# Altium PCB LEDThermometer.PcbDoc
Units mm, origin at the board's own origin, x right, y up, seen from the top; angles counter-clockwise.
Board outline 125 x 50 mm, 2 copper layers (Top Layer, Bottom Layer), stack 1.58 mm thick; 85 components, 69 nets, 272 pads, 8 vias.
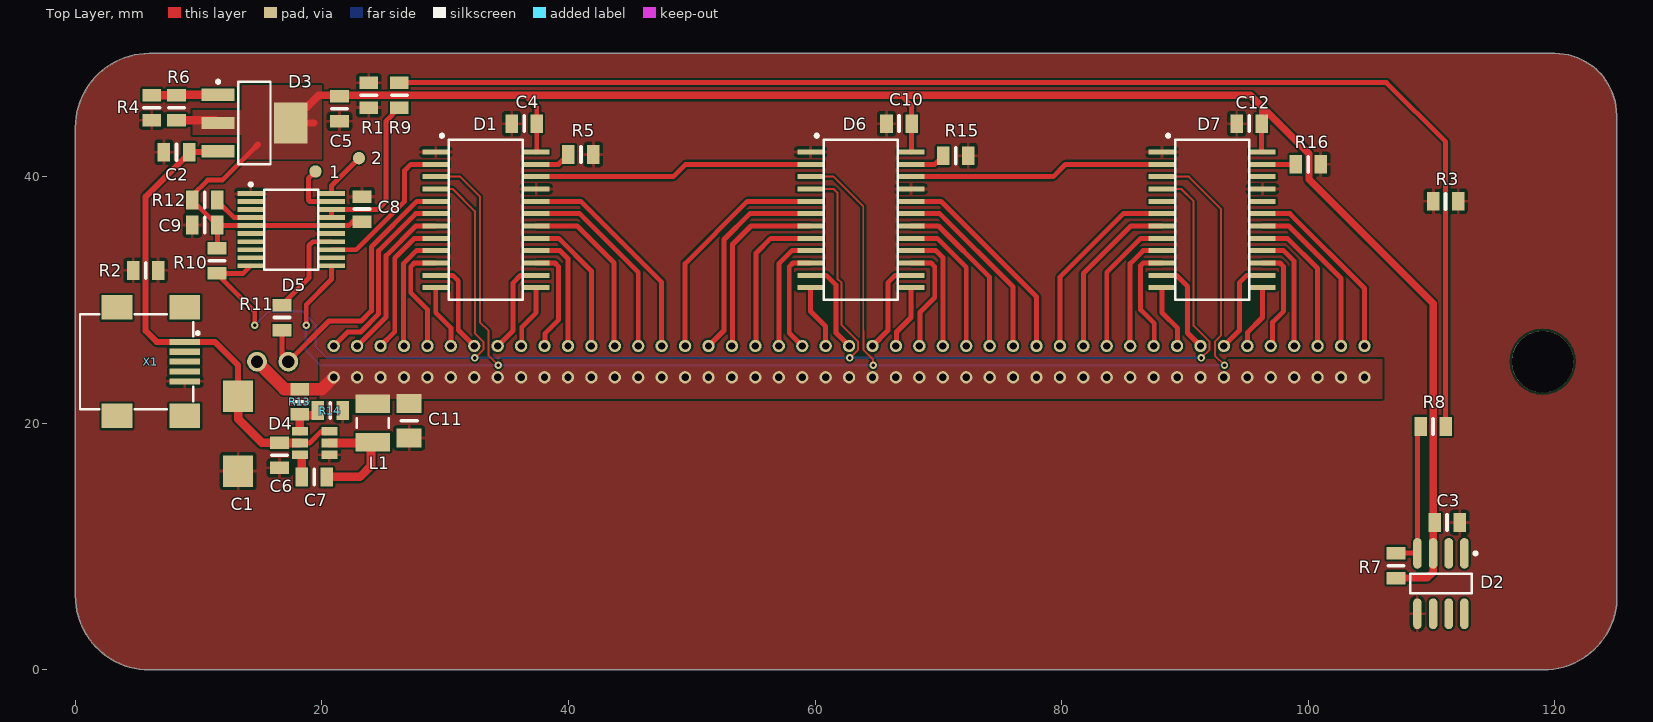
[diagram p0: Top Layer view]
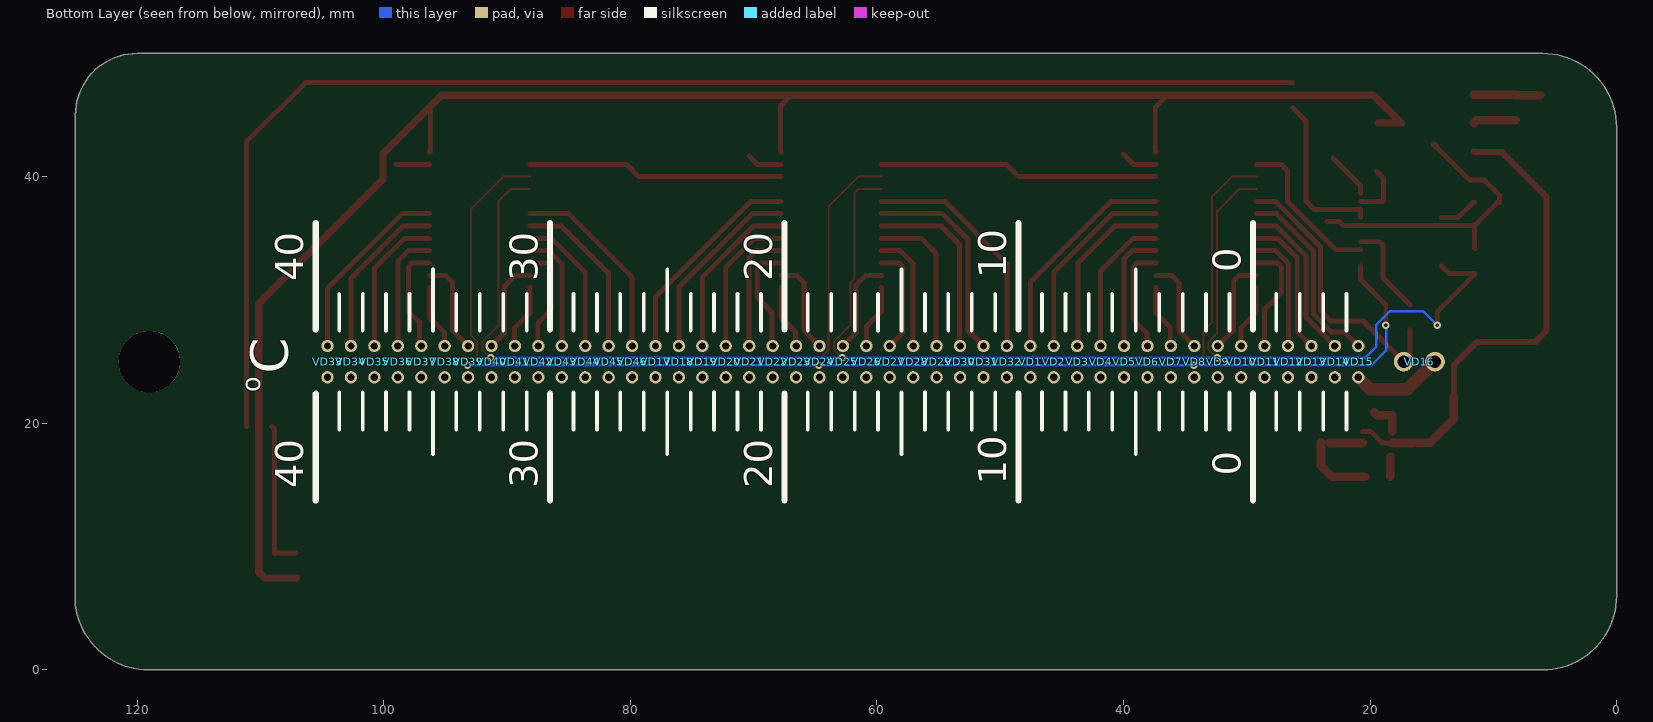
[diagram p1: Bottom Layer view, seen from below]
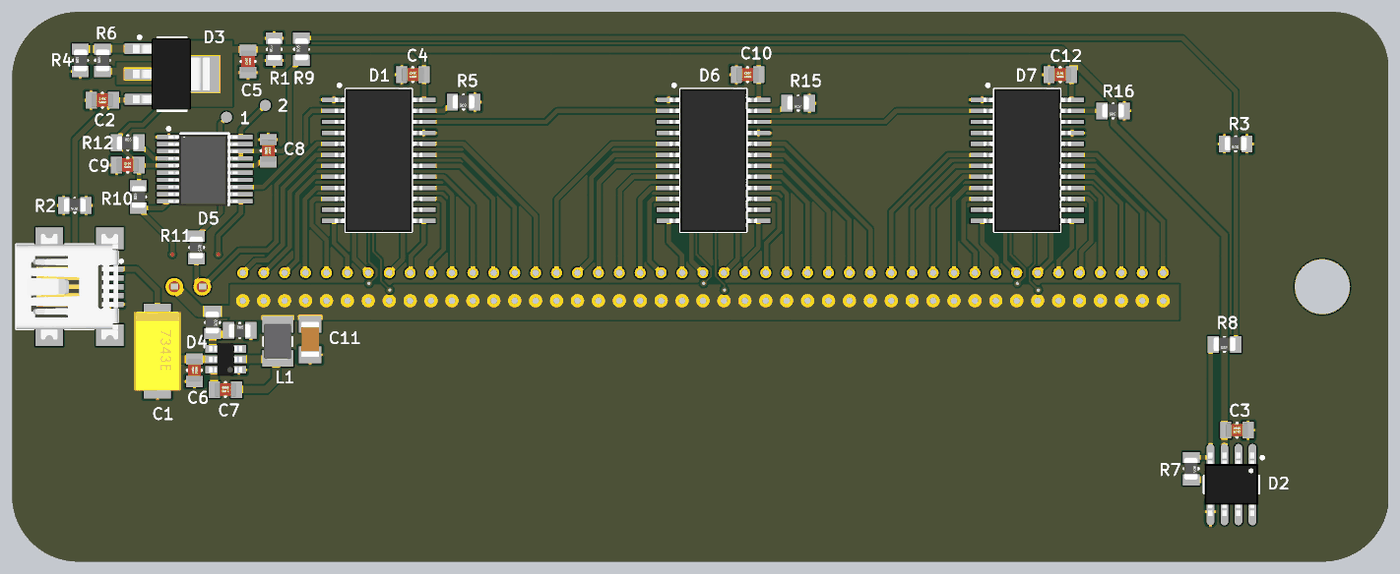
[diagram p2: 3D render of the assembled board from above, using the file's embedded part models]

## Layer stack, top to bottom
Top Solder: solder mask 0.0102, Solder Resist, Dk 3.5
Top Layer: signal copper 0.018
Dielectric 1: dielectric 1.5437, FR-4, Dk 4.8
Bottom Layer: signal copper 0.018
Bottom Solder: solder mask 0.0102, Solder Resist, Dk 3.5

## Board outline
0,44 0,6 ccw(c6,6) 6,0 119.047,0 ccw(c119.047,6) 125,5.251 125,44.989 ccw(c119.989,44.989) 119.989,50 6,50 ccw(c6,44)

## Design rules (kind name [scope] priority, off if disabled: settings)
Clearance [All] p1: gap=0.16 ignorepadtopadclearanceinfootprint=FALSE except(0: Arc-Hole Track-Hole SMDPad-Hole THPad-Hole Via-Hole Fill-Hole Poly-Hole Region-Hole Text-Hole)
ComponentClearance [All] p1: gap=-1 collisioncheckmode=3 verticalgap=0.254 showdistances=FALSE
HoleSize [All] p1: absolutevalues=TRUE maxlimit=5 minlimit=0.3 maxpercent=80.000 minpercent=20.000
PolygonConnect ThermoPowerPolygon [InNet('3,3В') or InNet('1,8В') or InNet('2,2В')] p1: connectstyle=Direct reliefconductorwidth=0.3 reliefentries=4 polygonreliefangle="90 Angle" airgapwidth=0.3
PolygonConnect PolygonConnect_1 [All] p2: connectstyle=Relief reliefconductorwidth=0.254 reliefentries=4 polygonreliefangle="90 Angle" airgapwidth=0.254
RoutingVias [All] p1: holewidth=0.711 width=1.27 viastyle="Through Hole" minholewidth=0.711 minwidth=1.27 maxholewidth=0.711 maxwidth=1.27
SolderMaskExpansion SolderMaskExpansion_LittleObj [InComponent('D4') or InComponent('D5') or InComponent('X1')] p1: expansion=0.15
SolderMaskExpansion [All] p2: expansion=0.102
Width WidthPower [InNet('5В') or InNet('3,3В') or InNet('1,8В') or InNet('NetC7_1') or InNet('GND')] p1: maxlimit=1.5 minlimit=0.4 preferedwidth=1.5 minimp=50.000000 maximp=50.000000 favimp=50.000000 checkconnectedcopper=TRUE
Width WidthAll [All] p2: maxlimit=1.5 minlimit=0.16 preferedwidth=0.4 minimp=50.000000 maximp=50.000000 favimp=50.000000 checkconnectedcopper=TRUE
28 further rules are at their usual default settings.

## Components (designator, comment, footprint, x,y, rotation, side; value= is the part's Value field where it differs from the comment)
1 "*" point 19.475,40.425 r90 top
2 "*" point 23,41.5 r90 top
C1 "D-20 В-47 мкФ±10 %" "CAP POL 2917/7343" 13.2,19.15 r270 top value="47 мкФ"
C2 "0805-16 В-X7R-1мкФ±10 %" SMD-0805C 8.2,41.975 r90 top value="1 мкФ"
C3 "0805-16 В-X7R-0,1мкФ±10 %" SMD-0805C 111.25,11.95 r270 top value="0,1 мкФ"
C4 "0805-16 В-X7R-0,1мкФ±10 %" SMD-0805C 36.4,44.3 r90 top value="0,1 мкФ"
C5 "0805-16 В-X7R-1мкФ±10 %" SMD-0805C 21.425,45.5 r180 top value="1 мкФ"
C6 "0805-16 В-X7R-0,1мкФ±10 %" SMD-0805C 16.55,17.4 r180 top value="0,1 мкФ"
C7 "0805-16 В-X7R-0,1мкФ±10 %" SMD-0805C 19.375,15.65 r270 top value="0,1 мкФ"
C8 "0805-16 В-X7R-0,1мкФ±10 %" SMD-0805C 23.25,37.375 r0 top value="0,1 мкФ"
C9 "0805-16 В-X7R-0,1мкФ±10 %" SMD-0805C 10.5,36.075 r90 top value="0,1 мкФ"
C10 "0805-16 В-X7R-0,1мкФ±10 %" SMD-0805C 66.8,44.3 r90 top value="0,1 мкФ"
C11 "1206-16 В-X7R-22мкФ±10 %" SMD-1206C 27.075,20.203 r180 top value="22 мкФ"
C12 "0805-16 В-X7R-0,1мкФ±10 %" SMD-0805C 95.2,44.3 r90 top value="0,1 мкФ"
D1 "MBI5039GF-B" SOP24L 33.3,36.5 r270 top locked
D2 "DS18B20Z+" SO8_M 110.75,7 r270 top
D3 "LM317DCYR" SOT223_M 14.525,44.35 r0 top
D4 "TPS562200DDCT" SOT23-6_M 19.4,18.4 r180 top
D5 "STM32F030F4P6" TSSOP-20 17.5,35.7 r270 top
D6 "MBI5039GF-B" SOP24L 63.7,36.5 r270 top locked
D7 "MBI5039GF-B" SOP24L 92.2,36.5 r270 top locked
L1 "NLCV32T-2R2M-EF" 1210_M 24.125,20.025 r90 top value="2,2 мкГн"
R1 "0805±5 %-0 Ом" SMD-0805-RES 23.8,46.6 r0 top value="0 Ом"
R2 "0805±5 %-0 Ом" SMD-0805-RES 5.7,32.4 r90 top value="0 Ом"
R3 "0805±5 %-0 Ом" SMD-0805-RES 111.131,38 r90 top value="0 Ом"
R4 "0805±1 %-2 кОм" SMD-0805-RES 6.2,45.6 r0 top value="2 кОм"
R5 "0805±1 %-10 кОм" SMD-0805-RES 41,41.8 r90 top value="10 кОм"
R6 "0805±1 %-1,3 кОм" SMD-0805-RES 8.2,45.6 r0 top value="1,3 кОм"
R7 "0805±5 %-4,7 кОм" SMD-0805-RES 107.1,8.45 r180 top value="4,7 кОм"
R8 "0805±5 %-0 Ом" SMD-0805-RES 110.115,19.75 r90 top value="0 Ом"
R9 "0805±5 %-0 Ом" SMD-0805-RES 26.275,46.609 r0 top value="0 Ом"
R10 "0805±5 %-10 кОм" SMD-0805-RES 11.475,33.175 r0 top value="10 кОм"
R11 "не устанавливать" SMD-0805-RES 16.75,28.575 r180 top value=DNP
R12 "0805±5 %-10 кОм" SMD-0805-RES 10.5,38.1 r270 top value="10 кОм"
R13 "0805±1 %-19,6 кОм" SMD-0805-RES 18.2,21.75 r180 top value="19,6 кОм"
R14 "0805±1 %-10,2 кОм" SMD-0805-RES 20.675,21.025 r270 top value="10,2 кОм"
R15 "0805±1 %-10 кОм" SMD-0805-RES 71.4,41.7 r90 top value="10 кОм"
R16 "0805±1 %-10 кОм" SMD-0805-RES 100,41 r90 top value="10 кОм"
VD1 "L-144IDT" LED_1.9x3.9mm 47.55,25 r90 bottom locked
VD2 "L-144IDT" LED_1.9x3.9mm 45.65,25 r90 bottom locked
VD3 "L-144IDT" LED_1.9x3.9mm 43.75,25 r90 bottom locked
VD4 "L-144IDT" LED_1.9x3.9mm 41.85,25 r90 bottom locked
VD5 "L-144IDT" LED_1.9x3.9mm 39.95,25 r90 bottom locked
VD6 "L-144IDT" LED_1.9x3.9mm 38.05,25 r90 bottom locked
VD7 "L-144IDT" LED_1.9x3.9mm 36.15,25 r90 bottom locked
VD8 "L-144IDT" LED_1.9x3.9mm 34.25,25 r90 bottom locked
VD9 "L-144IDT" LED_1.9x3.9mm 32.35,25 r90 bottom locked
VD10 "L-144IDT" LED_1.9x3.9mm 30.45,25 r90 bottom locked
VD11 "L-144IDT" LED_1.9x3.9mm 28.55,25 r90 bottom locked
VD12 "L-144IDT" LED_1.9x3.9mm 26.65,25 r90 bottom locked
VD13 "L-144IDT" LED_1.9x3.9mm 24.75,25 r90 bottom locked
VD14 "L-144IDT" LED_1.9x3.9mm 22.85,25 r90 bottom locked
VD15 "L-144IDT" LED_1.9x3.9mm 20.95,25 r90 bottom locked
VD16 "L-793ID" LED_8mm 16,25 r0 bottom locked
VD17 "L-144IDT" LED_1.9x3.9mm 77.95,25 r90 bottom locked
VD18 "L-144IDT" LED_1.9x3.9mm 76.05,25 r90 bottom locked
VD19 "L-144IDT" LED_1.9x3.9mm 74.15,25 r90 bottom locked
VD20 "L-144IDT" LED_1.9x3.9mm 72.25,25 r90 bottom locked
VD21 "L-144IDT" LED_1.9x3.9mm 70.35,25 r90 bottom locked
VD22 "L-144IDT" LED_1.9x3.9mm 68.45,25 r90 bottom locked
VD23 "L-144IDT" LED_1.9x3.9mm 66.55,25 r90 bottom locked
VD24 "L-144IDT" LED_1.9x3.9mm 64.65,25 r90 bottom locked
VD25 "L-144IDT" LED_1.9x3.9mm 62.75,25 r90 bottom locked
VD26 "L-144IDT" LED_1.9x3.9mm 60.85,25 r90 bottom locked
VD27 "L-144IDT" LED_1.9x3.9mm 58.95,25 r90 bottom locked
VD28 "L-144IDT" LED_1.9x3.9mm 57.05,25 r90 bottom locked
VD29 "L-144IDT" LED_1.9x3.9mm 55.15,25 r90 bottom locked
VD30 "L-144IDT" LED_1.9x3.9mm 53.25,25 r90 bottom locked
VD31 "L-144IDT" LED_1.9x3.9mm 51.35,25 r90 bottom locked
VD32 "L-144IDT" LED_1.9x3.9mm 49.45,25 r90 bottom locked
VD33 "L-144IDT" LED_1.9x3.9mm 104.55,25 r90 bottom locked
VD34 "L-144IDT" LED_1.9x3.9mm 102.65,25 r90 bottom locked
VD35 "L-144IDT" LED_1.9x3.9mm 100.75,25 r90 bottom locked
VD36 "L-144IDT" LED_1.9x3.9mm 98.85,25 r90 bottom locked
VD37 "L-144IDT" LED_1.9x3.9mm 96.95,25 r90 bottom locked
VD38 "L-144IDT" LED_1.9x3.9mm 95.05,25 r90 bottom locked
VD39 "L-144IDT" LED_1.9x3.9mm 93.15,25 r90 bottom locked
VD40 "L-144IDT" LED_1.9x3.9mm 91.25,25 r90 bottom locked
VD41 "L-144IDT" LED_1.9x3.9mm 89.35,25 r90 bottom locked
VD42 "L-144IDT" LED_1.9x3.9mm 87.45,25 r90 bottom locked
VD43 "L-144IDT" LED_1.9x3.9mm 85.55,25 r90 bottom locked
VD44 "L-144IDT" LED_1.9x3.9mm 83.65,25 r90 bottom locked
VD45 "L-144IDT" LED_1.9x3.9mm 81.75,25 r90 bottom locked
VD46 "L-144IDT" LED_1.9x3.9mm 79.85,25 r90 bottom locked
X1 "DS1104-B60SRS" Mini-USB-B 5,25 r270 top locked

## Footprints (in the part's own frame and the unit in brackets; to place one, negate y for a bottom-side part, rotate by r counter-clockwise, add the part's x,y. Pads: shape width x height; smd on the part's side, far side on the other; paste and mask are expansions set on the pad)
1210_M [mm] "Body 3.2x2.5mm, IPC Low Density"
  rect 1.5x2.8 smd: 1(-1.55,0) 2(1.55,0)
  silkscreen extent -0.4,-1.3 0.4,1.3, body extent -1.6,-1.25 1.6,1.25, height 1.9
"CAP POL 2917/7343" [mm] "Molded Capacitor, 2-Leads, Body 7.30x4.30mm, IPC Medium Density"
  rect 2.55x2.45 smd: 1(-3.025,0) 2(3.025,0)
  body extent -3.65,-2.15 3.65,2.15, height 4.1
LED_1.9x3.9mm [mm] "Photosensitive Diode; 2 Leads"
  round 1 hole 0.6: 1(-1.27,0) 2(1.27,0)
  body extent -1.95,-0.95 1.95,0.95, height 7
LED_8mm [mm] "Photosensitive Diode; 2 Leads"
  round 1.6 hole 1: 1(-1.27,0) 2(1.27,0)
  body extent -4.48,-4.52 4.05,4.47, height 11
Mini-USB-B [mm] "Mini USB 2.0 Type B SMT Horizontal 5 Contacts"
  rect 0.5x2.5 smd: 1(-1.6,3.875) 2(-0.8,3.875) 3(0,3.875) 4(0.8,3.875) 5(1.6,3.875)
  rect 2x2.5 smd: Shell(-4.4,3.875) Shell(-4.4,-1.625) Shell(4.4,3.875) Shell(4.4,-1.625)
  silkscreen extent -3.85,-4.62 3.85,5.04, body extent -4.8,-4.62 4.8,4.63, height 3.92
point [mm] "Point; 1 Position"
  round 1 smd: 1(0,0)
SMD-0805-RES [mil]
  rect 60x40 smd: 1(0,40) 2(0,-40)
  silkscreen extent -25,0 25,0, body extent -24,-39 26,39, height 31
SMD-0805C [mil]
  rect 60x40 smd: 1(0,40) 2(0,-40)
  silkscreen extent -25,0 25,0, body extent -25,-39 25,39, height 35
SMD-1206C [mil]
  rect 80x60 smd: 1(0,55) 2(0,-55)
  silkscreen extent -25,0 25,0, body extent -31,-63 32,63, height 39
SO8_M [mm] "SOIC, 8-Leads, Body 4.9x3.9mm, Pitch 1.27mm, IPC Low Density"
  oval 2.5x0.7 smd: 1(-2.45,1.905) 2(-2.45,0.635) 3(-2.45,-0.635) 4(-2.45,-1.905) 5(2.45,-1.905) 6(2.45,-0.635) 7(2.45,0.635) 8(2.45,1.905)
  silkscreen extent -2.57,-2.5 0.8,2.93, body extent -2.91,-2.45 2.86,2.45, height 1.45
SOP24L [mm] "SOP, Plastic; 24 Leads; Body Width 6 mm; Pitch 1 mm"
  rect 0.4x2.15 smd: 1(-5.5,-4.075) 2(-4.5,-4.075) 3(-3.5,-4.075) 4(-2.5,-4.075) 5(-1.5,-4.075) 6(-0.5,-4.075) 7(0.5,-4.075) 8(1.5,-4.075) 9(2.5,-4.075) 10(3.5,-4.075) 11(4.5,-4.075) 12(5.5,-4.075) 13(5.5,4.075) 14(4.5,4.075) 15(3.5,4.075) 16(2.5,4.075) 17(1.5,4.075) 18(0.5,4.075) 19(-0.5,4.075) 20(-1.5,4.075) 21(-2.5,4.075) 22(-3.5,4.075) 23(-4.5,4.075) 24(-5.5,4.075)
  silkscreen extent -6.95,-3.7 6.5,3, body extent -6.5,-3.98 6.5,3.98, height 1.65
SOT23-6_M [mm] "SOT23, 6-Leads, Body 2.9x1.6mm, Pitch 0.95mm, Lead Span 2.7mm, IPC Low Density"
  rect 1.3x0.7 smd: 1(-1.2,0.95) 2(-1.2,0) 3(-1.2,-0.95) 4(1.2,-0.95) 5(1.2,0) 6(1.2,0.95)
  body extent -1.5,-1.5 1.5,1.5, height 1.3
SOT223_M [mm] "SOT223, 4-Leads, Body 6.5x3.5mm, Pitch 2.3mm, Lead Span 7mm, IPC Low Density"
  rect 2.7x1 smd: 1(-2.95,2.3) 2(-2.95,0) 3(-2.95,-2.3)
  rect 2.7x3.3 smd: 2(2.95,0)
  silkscreen extent -3.07,-3.35 1.3,3.47, body extent -3.55,-3.25 3.41,3.25, height 1.65
TSSOP-20 [mm] "TSSOP, Plastic; 20 Leads; Body Width 5.3 mm; Pitch 0.65 mm"
  rect 0.4x2.15 smd: 1(-2.925,-3.275) 2(-2.275,-3.275) 3(-1.625,-3.275) 4(-0.975,-3.275) 5(-0.325,-3.275) 6(0.325,-3.275) 7(0.975,-3.275) 8(1.625,-3.275) 9(2.275,-3.275) 10(2.925,-3.275) 11(2.925,3.275) 12(2.275,3.275) 13(1.625,3.275) 14(0.975,3.275) 15(0.325,3.275) 16(-0.325,3.275) 17(-0.975,3.275) 18(-1.625,3.275) 19(-2.275,3.275) 20(-2.925,3.275)
  silkscreen extent -3.8,-3.4 3.25,2.2, body extent -3.15,-3.29 3.35,2.99, height 1.1

## Part data
1 2: library part Point
C1: library part Cap_el, "Electrolytic capacitor", ComponentLink1Description=Datasheet
C2 C3 C4 C5 C6 C7 C8 C9 C10 C11 C12: library part Cap, "Capacitor", ComponentLink1Description=Datasheet
D1 D6 D7: library part MBI5039, "16-Channel Constant Current LED Sink Driver with Silent Error Detection and Current Gain", Manufacturer=Macroblock, ComponentLink1Description=Datasheet, ComponentLink1URL=http://www.sddz-ic.com/en/upload/2009321152554277566SA6V.pdf
D2: library part DS18B20, "Programmable Resolution 1-Wire Digital Thermometer", Manufacturer="Maxim Integrated", ComponentLink1Description=Datasheet, ComponentLink1URL=https://datasheets.maximintegrated.com/en/ds/DS18B20.pdf
D3: library part LM317, "3-Terminal Adjustable Regulator", Manufacturer="Texas Instruments", ComponentLink1Description=Datasheet, ComponentLink1URL=http://www.ti.com/lit/ds/symlink/lm317.pdf
D4: library part TPS562200, "4.5-V To 17-V Input, 2-A, 3-A Synchronous Step-Down Voltage Regulator", Manufacturer="Texas Instruments", ComponentLink1Description=Datasheet, ComponentLink1URL=http://www.ti.com/lit/ds/symlink/tps562200.pdf
D5: library part STM32F030F, "Value-line ARM®-based 32-bit MCU with up to 256-KB Flash,   timers, ADC, communication interfaces, 2.4-3.6 V operation", Manufacturer=STMicroelectronics, ComponentLink1Description=Datasheet, ComponentLink1URL=http://www.st.com/content/ccc/resource/technical/document/datasheet/a4/5d/0b/0e/87/c4/4d/71/DM00088500.pdf/files/DM00088500.pdf/jcr:content/translations/en.DM00088500.pdf
L1: library part Inductor, "Inductor", Manufacturer=TDK, ComponentLink1Description=Datasheet, ComponentLink1URL=https://product.tdk.com/info/en/catalog/datasheets/inductor_commercial_decoupling_nlcv32-ef_en.pdf
R1 R2 R3 R4 R5 R6 R7 R8 R9 R10 R11 R12 R13 R14 R15 R16: library part Res, "Resistor", ComponentLink1Description=Datasheet
VD1 VD2 VD3 VD4 VD5 VD6 VD7 VD8 VD9 VD10 VD11 VD12 VD13 VD14 VD15 VD16 VD17 VD18 VD19 VD20 VD21 VD22 VD23 VD24 VD25 VD26 VD27 VD28 VD29 VD30 VD31 VD32 VD33 VD34 VD35 VD36 VD37 VD38 VD39 VD40 VD41 VD42 VD43 VD44 VD45 VD46: library part LED, "Typical INFRARED GaAs LED", Manufacturer=Kingbright, ComponentLink1Description=Datasheet
  VD1 VD2 VD3 VD4 VD5 VD6 VD7 VD8 VD9 VD10 VD11 VD12 VD13 VD14 VD15 VD17 VD18 VD19 VD20 VD21 VD22 VD23 VD24 VD25 VD26 VD27 VD28 VD29 VD30 VD31 VD32 VD33 VD34 VD35 VD36 VD37 VD38 VD39 VD40 VD41 VD42 VD43 VD44 VD45 VD46: ComponentLink1URL=http://www.kingbright.com/attachments/file/psearch/000/00/00/L-144IDT(Ver.13A).pdf
  VD16: ComponentLink1URL=http://www.kingbright.com/attachments/file/psearch/000/00/00/L-793ID(Ver.10A).pdf
X1: library part MINI-USB-B, "Mini USB-B connector", Manufacturer="Connfly Electronics", ComponentLink1Description=Datasheet, ComponentLink1URL=https://lib.chipdip.ru/497/DOC001497231.pdf

## Free pads (board coordinates)
  round 5 hole 5: 2(119,25)

## Via types
v1: diameter 0.6, hole 0.3, Top Layer to Bottom Layer, tented both sides, 8 vias

## Nets (pads, with @x,y where several pads share a name; then routed paths per layer and width w, separated by ;. In a path a pad name is that pad's centre, name@x,y a point inside that pad or via, vN(x,y) a via of type N, cw(c..) or ccw(c..) an arc to the next point about the centre after c; other vN are vias at no path point)
0t: D1.10 VD11.2 | length 9.1
  Top Layer w0.4: VD11.2 28.55,29.25 27.2,30.6 27.2,32.7 27.5,33 D1.10
1t: D1.12 VD10.2 | length 5.2
  Top Layer w0.4: D1.12 29.225,28.975 30.45,27.75 VD10.2
2,2В: C11.2 L1.2 R13.2 VD1.1 VD2.1 VD3.1 VD4.1 VD5.1 VD6.1 VD7.1 VD8.1 VD9.1 VD10.1 VD11.1 VD12.1 VD13.1 VD14.1 VD15.1 VD16.1 VD17.1 VD18.1 VD19.1 VD20.1 VD21.1 VD22.1 VD23.1 VD24.1 VD25.1 VD26.1 VD27.1 VD28.1 VD29.1 VD30.1 VD31.1 VD32.1 VD33.1 VD34.1 VD35.1 VD36.1 VD37.1 VD38.1 VD39.1 VD40.1 VD41.1 VD42.1 VD43.1 VD44.1 VD45.1 VD46.1 | length 7.5
  Top Layer w1: VD16.1 16.955,22.775 ; 19.995,22.775 VD15.1
  Top Layer w1.016: 16.955,22.775 19.995,22.775
2t: D1.11 VD9.2 | length 7.8
  Top Layer w0.4: D1.11 30.6,32 31.05,31.55 31.05,27.57 VD9.2
3,3В: C3.2 C4.2 C5.2 C8.2 C9.2 C10.2 C12.2 D1.24 D2.3 D3.2 D5.5 D5.16 D6.24 D7.24 R6.2 R7.1 R10.1 R12.2 | length 170.3
  Top Layer w0.4: R10.1 11.516,34.232 C9.2 ; 14.6,42.4 11.925,39.725 10.725,39.725 9.484,38.484 9.484,37.9 9.691,37.9 C9.2 ; C8.2@23.509,36.359 C8.2 22.484,36.359 22.15,36.025 D5.16 D5.5 11.566,36.025 C9.2 ; 36.45,46.6 37.416,45.634 C4.2 37.416,42.041 D1.24 ; 66.95,46.6 67.816,45.734 C10.2 67.816,42.041 D6.24 ; 96.2,45.625 96.2,44.316 C12.2 96.216,42.059 D7.24
  Top Layer w0.5: D3.2@11.575,44.35 D3.2@11.625,44.3 ; 14.6,42.4 14.8,42.6
  Top Layer w0.6: 19.35,44.35 17.475,44.35 19.725,46.6 36.45,46.6 66.95,46.6 95.305,46.6 100.048,41.857 100.048,39.778 110.115,29.711 D2.3 110.115,7.915 109.65,7.45 107.116,7.45 R7.1
  Top Layer w0.7: R6.2 11.341,44.584 D3.2@11.575,44.35
3t: D1.14 VD8.2 | length 7.8
  Top Layer w0.4: VD8.2 35.5,27.52 35.5,31.4 36.1,32 D1.14
4t: D1.13 VD7.2 | length 5.3
  Top Layer w0.4: D1.13 37.375,28.975 36.2,27.8 VD7.2@36.2,26.32 ; VD7.2@36.2,26.32 VD7.2 VD7.2@36.2,26.32
5t: D1.15 VD6.2 | length 8.9
  Top Layer w0.4: D1.15 38.9,33 39.2,32.7 39.2,28.4 38.1,27.3 38.1,26.32 VD6.2
5В: C1.1 C2.2 C6.2 D3.3 D4.3 D4.5 X1.1 | length 39.9
  Top Layer w0.4: D4.5 19,18.4 19.95,19.35 D4.3
  Top Layer w0.5: D3.3 11.525,42 9.316,42 5.7,38.384 5.7,27.5 6.6,26.6 X1.1 11.3,26.6 13.2,24.7 C1.1
  Top Layer w0.7: C1.1 13.2,20.35 15.134,18.416 16.475,18.416 16.491,18.4 D4.5
6t: D1.16 VD5.2 | length 9.9
  Top Layer w0.4: D1.16 39.3,34 39.95,33.35 VD5.2
7t: D1.17 VD4.2 | length 11.7
  Top Layer w0.4: D1.17 39.2,35 41.85,32.35 VD4.2
8t: D1.18 VD3.2 | length 14.3
  Top Layer w0.4: D1.18 40.7,36 43.7,33 43.7,26.32 VD3.2
9t: D1.19 VD2.2 | length 16.2
  Top Layer w0.4: D1.19 40.9,37 45.65,32.25 VD2.2
10t: D1.20 VD1.2 | length 18.1
  Top Layer w0.4: D1.20 41,38 47.55,31.45 VD1.2
11t: D6.5 VD32.2 | length 18.9
  Top Layer w0.4: VD32.2 49.45,32.95 54.5,38 D6.5
12t: D6.6 VD31.2 | length 17
  Top Layer w0.4: VD31.2 52.6,27.52 52.6,34.9 54.7,37 D6.6
13t: D6.7 VD30.2 | length 15.2
  Top Layer w0.4: VD30.2 53.3,26.32 53.3,34.5 54.8,36 D6.7
14t: D6.8 VD29.2 | length 12.5
  Top Layer w0.4: VD29.2 55.2,26.32 55.2,33.8 56.4,35 D6.8
15t: D6.9 VD28.2 | length 9.7
  Top Layer w0.4: VD28.2 57.05,32.95 58.1,34 D6.9
16t: D6.10 VD27.2 | length 8.7
  Top Layer w0.4: VD27.2 57.9,27.32 57.9,32.7 58.2,33 D6.10
17t: D6.12 VD26.2 | length 5.2
  Top Layer w0.4: D6.12 59.625,29.075 60.85,27.85 VD26.2
18t: D6.11 VD25.2 | length 7.8
  Top Layer w0.4: D6.11 60.9,32 61.7,31.2 61.7,27.32 VD25.2
19t: D6.14 VD24.2 | length 7.8
  Top Layer w0.4: VD24.2 65.9,27.52 65.9,31.4 66.5,32 D6.14
20t: D6.13 VD23.2 | length 5.2
  Top Layer w0.4: VD23.2 66.6,26.32 66.6,27.4 67.775,28.575 D6.13
21t: D6.15 VD22.2 | length 9
  Top Layer w0.4: D6.15 69.4,33 69.7,32.7 69.7,30.2 68.5,29 68.5,26.32 VD22.2
22t: D6.16 VD21.2 | length 10
  Top Layer w0.4: D6.16 69.8,34 70.35,33.45 VD21.2
23t: D6.17 VD20.2 | length 11.8
  Top Layer w0.4: D6.17 69.9,35 72.25,32.65 VD20.2
24t: D6.18 VD19.2 | length 13.7
  Top Layer w0.4: D6.18 70,36 74.15,31.85 VD19.2
25t: D6.19 VD18.2 | length 15.5
  Top Layer w0.4: D6.19 70.1,37 76.05,31.05 VD18.2
26t: D6.20 VD17.2 | length 17.4
  Top Layer w0.4: D6.20 70.2,38 77.95,30.25 VD17.2
27t: D7.6 VD46.2 | length 16
  Top Layer w0.4: VD46.2 79.85,31.85 85,37 D7.6
28t: D7.7 VD45.2 | length 13.8
  Top Layer w0.4: VD45.2 81.75,32.15 85.6,36 86.9,36 D7.7
29t: D7.8 VD44.2 | length 11.6
  Top Layer w0.4: VD44.2 83.65,32.25 86.4,35 D7.8
30t: D7.9 VD43.2 | length 9.7
  Top Layer w0.4: VD43.2 85.55,32.95 86.6,34 D7.9
31t: D7.10 VD42.2 | length 8.8
  Top Layer w0.4: VD42.2 87.5,26.32 87.5,28.1 86.4,29.2 86.4,32.8 86.6,33 D7.10
32t: D7.12 VD41.2 | length 5.3
  Top Layer w0.4: D7.12 88.125,28.975 89.4,27.7 89.4,26.32 VD41.2
33t: D7.11 VD40.2 | length 7.7
  Top Layer w0.4: D7.11 89.3,32 90.2,31.1 90.2,27.32 VD40.2
34t: D7.14 VD39.2 | length 7.8
  Top Layer w0.4: VD39.2 94.4,27.52 94.4,31.4 95,32 D7.14
35t: D7.13 VD38.2 | length 5.2
  Top Layer w0.4: VD38.2 95.05,27.35 96.275,28.575 D7.13
36t: D7.15 VD37.2 | length 8.7
  Top Layer w0.4: D7.15 97.7,33 98,32.7 98,29.1 97.1,28.2 97.1,26.42 VD37.2
37t: D7.16 VD36.2 | length 9.8
  Top Layer w0.4: D7.16 98,34 98.85,33.15 VD36.2
38t: D7.17 VD35.2 | length 11.8
  Top Layer w0.4: D7.17 98.3,35 100.75,32.55 VD35.2
39t: D7.18 VD34.2 | length 13.6
  Top Layer w0.4: D7.18 98.4,36 102.65,31.75 VD34.2
40t: D7.19 VD33.2 | length 15.5
  Top Layer w0.4: D7.19 98.5,37 104.55,30.95 VD33.2
-1t: D1.9 VD12.2 | length 9.8
  Top Layer w0.4: VD12.2 26.6,26.32 26.6,32.949 27.651,34 D1.9
-2t: D1.8 VD13.2 | length 11.6
  Top Layer w0.4: VD13.2 25.9,27.42 25.9,33.4 27.5,35 D1.8
-3t: D1.7 VD14.2 | length 13.3
  Top Layer w0.4: VD14.2 25.2,28.62 25.2,33.6 27.6,36 D1.7
-4t: D1.6 VD15.2 | length 15.7
  Top Layer w0.4: VD15.2 22.08,27.4 23.131,27.4 24.6,28.869 24.6,34 27.6,37 D1.6
-5t: D1.5 R11.1 VD16.2 | length 23.2
  Top Layer w0.4: R11.1 16.75,25.52 VD16.2 20.57,28.3 23.183,28.3 24,29.117 24,34.3 27.7,38 D1.5
GND: C1.2 C2.1 C3.1 C4.1 C5.1 C6.1 C8.1 C9.1 C10.1 C11.1 C12.1 D1.1 D1.21 D2.5 D4.1 D5.1 D5.15 D6.1 D6.21 D7.1 D7.21 R1.1 R1.2 R2.1 R2.2 R3.1 R3.2 R4.2 R5.2 R14.1 R15.2 R16.2 X1.5
Net1_1: 1.1 D5.19 | length 4.5
  Top Layer w0.4: 1.1 18.9,39.85 18.9,38.1 19.025,37.975 D5.19
Net2_1: 2.1 D5.20 | length 3.8
  Top Layer w0.4: D5.20 20.775,39.275 2.1
NetC7_1: C7.1 D4.2 L1.1 | length 8.6
  Top Layer w0.4: 22.15,18.4 22.2,18.45
  Top Layer w0.7: C7.1 23.075,15.65 23.975,16.55 23.975,18.45 L1.1@23.95,18.475 ; D4.2 22.15,18.4 L1.1@23.25,18.4
NetC7_2: C7.2 D4.6 | length 1.9
  Top Layer w0.4: D4.6 D4.6@18.359,17.291
  Top Layer w0.7: C7.2 D4.6@18.359,17.291
NetD1_23: D1.23 R5.1 | length 2.9
  Top Layer w0.4: D1.23 39.184,41 R5.1
NetD2_4: D2.4 R7.2 R8.1 | length 12.2
  Top Layer w0.4: R7.2 108.829,9.466 D2.4 108.845,19.496 R8.1
NetD3_1: D3.1 R4.1 R6.1 | length 5.4
  Top Layer w0.7: R4.1 R6.1 8.234,46.65 D3.1
NetD4_4: D4.4 R13.1 R14.2 | length 2.9
  Top Layer w0.7: D4.4 18.2,20.659 19.418,20.659 R14.2@19.659,20.9
NetD5_4: D5.4 R12.1 | length 3.2
  Top Layer w0.4: R12.1@11.516,37.9 11.65,37.9 12.875,36.675 D5.4
NetD5_14: D5.14 R11.2 | length 7.7
  Top Layer w0.4: R11.2 18.95,31.791 18.95,34.425 19.25,34.725 D5.14
NetD5_17: D5.17 D5.18 R9.2 | length 13.4
  Top Layer w0.4: D5.17 D5.18 24.5,37.325 25.2,38.025 25.2,44.518 R9.2
NetD6_23: D6.23 R15.1 | length 2.9
  Top Layer w0.4: D6.23 69.684,41 R15.1
NetD7_23: D7.23 R16.1 | length 2.7
  Top Layer w0.4: D7.23 R16.1
NetR8_2: R8.2 R9.1 | length 109.9
  Top Layer w0.4: R9.1 106.325,47.625 111.131,42.819 R8.2
SPI_CLK: D1.3 D5.11 D6.3 D7.3 | length 138.9
  Top Layer w0.16: D1.3 31.2,40 32.8,38.4 32.8,28.2 33.51,27.49 33.51,25.49 v1(34.3,24.7) ; D6.3 61.5,40 63.9,37.6 63.9,27.5 63.91,27.49 63.91,25.963 64.7,25.173 v1(64.7,24.7) ; D7.3 90.3,40 92.9,37.4 92.9,27.1 92.41,26.61 92.41,25.49 v1(93.2,24.7)
  Top Layer w0.4: v1(18.725,27.95) 18.725,29.625 20.775,31.675 D5.11
  Bottom Layer w0.2: v1(18.725,27.95) 18.7,27.925 18.7,25.9 19.9,24.7 v1(34.3,24.7) v1(64.7,24.7) v1(93.2,24.7)
SPI_MOSI: D1.2 D5.13 | length 12.8
  Top Layer w0.4: D5.13 22.775,34.075 26.7,38 26.7,40.5 27.2,41 D1.2
SPI_MOSI1: D1.22 D6.2 | length 22.7
  Top Layer w0.4: D1.22 48.5,40 49.5,41 D6.2
SPI_MOSI2: D6.22 D7.2 | length 20.8
  Top Layer w0.4: D6.22 79.3,40 80.3,41 D7.2
SPI_NSS: D1.4 D5.10 D6.4 D7.4 R10.2 | length 137.9
  Top Layer w0.16: D1.4 30.6,39 32.4,37.2 32.4,27.3 33.09,26.61 33.09,25.963 32.427,25.3 v1(32.4,25.3) ; D6.4 61.5,39 61.8,38.7 61.8,31.722 62.14,31.382 62.14,27.96 63.49,26.61 63.49,25.963 62.827,25.3 v1(62.8,25.3) ; D7.4 89.7,39 90.7,38 90.7,27.9 91.99,26.61 91.99,25.963 91.327,25.3 v1(91.3,25.3)
  Top Layer w0.4: D5.10 13.609,32.159 R10.2 11.475,32.125 14.55,29.05 v1@14.55,28
  Bottom Layer w0.2: v1@14.55,28 14.6,28 15.7,29.1 18.367,29.1 19.5,27.967 19.5,26.2 20.4,25.3 v1(32.4,25.3) v1(62.8,25.3) v1(91.3,25.3)
  other v1: 14.55,27.95
pads on no net: D2.1 D2.2 D2.6 D2.7 D2.8 D5.2 D5.3 D5.6 D5.7 D5.8 D5.9 D5.12 D7.5 D7.20 D7.22 X1.2 X1.3 X1.4 X1.Shell

## Polygon pours and split planes (outlines as drawn)
GND on Top Layer "GND_L01_P012" (solid, remove dead copper, pour order 12): 0,44 0,6 ccw(c6,6) 6,0 119.047,0 ccw(c119.047,5.953) 125,5.953 125,44.989 ccw(c119.989,44.989) 119.989,50 6,50 ccw(c6,44)
2,2В on Top Layer "2,2В_L01_P010" (solid, remove dead copper, pour order 10): 19.8,25.2 19.8,22 106,22 106,25.2
3,3В on Top Layer "3,3В_L01_P008" (solid, remove dead copper, pour order 8): 20,47.4 20,41.4 13.5,41.4 13.5,43.4 9.5,43.4 9.5,45.4 13.5,45.4 13.5,47.4

## Silkscreen, mask and mechanical layers (free items; w line width, h text height)
Bottom Overlay:
  lines w0.3: 21.9,19.5 21.9,22.5 ; 21.9,27.5 21.9,30.5 ; 23.8,19.5 23.8,22.5 ; 23.8,27.5 23.8,30.5 ; 25.7,19.5 25.7,22.5 ; 25.7,27.5 25.7,30.5 ; 27.6,19.5 27.6,22.5 ; 27.6,27.5 27.6,30.5 ; 31.4,19.5 31.4,22.5 ; 31.4,27.5 31.4,30.5 ; 33.3,19.5 33.3,22.5 ; 33.3,27.5 33.3,30.5 ; 35.2,19.5 35.2,22.5 ; 35.2,27.5 35.2,30.5 ; 37.1,19.5 37.1,22.5 ; 37.1,27.5 37.1,30.5 ; 39,17.5 39,22.5 ; 39,27.5 39,32.5 ; 40.9,19.5 40.9,22.5 ; 40.9,27.5 40.9,30.5 ; 42.8,19.5 42.8,22.5 ; 42.8,27.5 42.8,30.5 ; 44.7,19.5 44.7,22.5 ; 44.7,27.5 44.7,30.5 ; 46.6,19.5 46.6,22.5 ; 46.6,27.5 46.6,30.5 ; 50.4,19.5 50.4,22.5 ; 50.4,27.5 50.4,30.5 ; 52.3,19.5 52.3,22.5 ; 52.3,27.5 52.3,30.5 ; 54.2,19.5 54.2,22.5 ; 54.2,27.5 54.2,30.5 ; 56.1,19.5 56.1,22.5 ; 56.1,27.5 56.1,30.5 ; 58,17.5 58,22.5 ; 58,27.5 58,32.5 ; 59.9,19.5 59.9,22.5 ; 59.9,27.5 59.9,30.5 ; 61.8,19.5 61.8,22.5 ; 61.8,27.5 61.8,30.5 ; 63.7,19.5 63.7,22.5 ; 63.7,27.5 63.7,30.5 ; 65.6,19.5 65.6,22.5 ; 65.6,27.5 65.6,30.5 ; 69.4,19.5 69.4,22.5 ; 69.4,27.5 69.4,30.5 ; 71.3,19.5 71.3,22.5 ; 71.3,27.5 71.3,30.5 ; 73.2,19.5 73.2,22.5 ; 73.2,27.5 73.2,30.5 ; 75.1,19.5 75.1,22.5 ; 75.1,27.5 75.1,30.5 ; 77,17.5 77,22.5 ; 77,27.5 77,32.5 ; 78.9,19.5 78.9,22.5 ; 78.9,27.5 78.9,30.5 ; 80.8,19.5 80.8,22.5 ; 80.8,27.5 80.8,30.5 ; 82.7,19.5 82.7,22.5 ; 82.7,27.5 82.7,30.5 ; 84.6,19.5 84.6,22.5 ; 84.6,27.5 84.6,30.5 ; 88.4,19.5 88.4,22.5 ; 88.4,27.5 88.4,30.5 ; 90.3,19.5 90.3,22.5 ; 90.3,27.5 90.3,30.5 ; 92.2,19.5 92.2,22.5 ; 92.2,27.5 92.2,30.5 ; 94.1,19.5 94.1,22.5 ; 94.1,27.5 94.1,30.5 ; 96,17.5 96,22.5 ; 96,27.5 96,32.5 ; 97.9,19.5 97.9,22.5 ; 97.9,27.5 97.9,30.5 ; 99.8,19.5 99.8,22.5 ; 99.8,27.5 99.8,30.5 ; 101.7,19.5 101.7,22.5 ; 101.7,27.5 101.7,30.5 ; 103.6,19.5 103.6,22.5 ; 103.6,27.5 103.6,30.5
  lines w0.5: 29.5,13.75 29.5,22.4 ; 29.5,27.6 29.5,36.25 ; 48.5,13.75 48.5,22.4 ; 48.5,27.6 48.5,36.25 ; 67.5,13.75 67.5,22.4 ; 67.5,27.6 67.5,36.25 ; 86.5,13.75 86.5,22.4 ; 86.5,27.6 86.5,36.25 ; 105.5,13.75 105.5,22.4 ; 105.5,27.6 105.5,36.25
  text "0" at 30.5,32.25 h2.29 r270
  text "10" at 49.5,31.75 h2.29 r270
  text "20" at 68.5,31.5 h2.29 r270
  text "30" at 87.5,31.5 h2.29 r270
  text "40" at 106.5,31.5 h2.29 r270
  text "C" at 107.75,24 h3.05 r270
  text "o" at 110,22.5 h1.52 r270
  text "0" at 30.5,17.75 h2.29 r270
  text "10" at 49.5,15 h2.29 r270
  text "20" at 68.5,14.75 h2.29 r270
  text "30" at 87.5,14.75 h2.29 r270
  text "40" at 106.5,14.75 h2.29 r270
Mechanical 15:
  the board outline again, w0.6